# Altium PCB BCM_ECU_revA_V2.PcbDoc (part 4 of 4)
Units mm, origin at the board's own origin, x right, y up, seen from the top; angles counter-clockwise.
Board outline 170 x 110 mm, 4 copper layers (TOP SIG, GND, PWR, BOT SIG), stack 0.603 mm thick; 422 components, 413 nets, 1412 pads, 185 vias.
Unrouted connection lines stored in the file: 642.
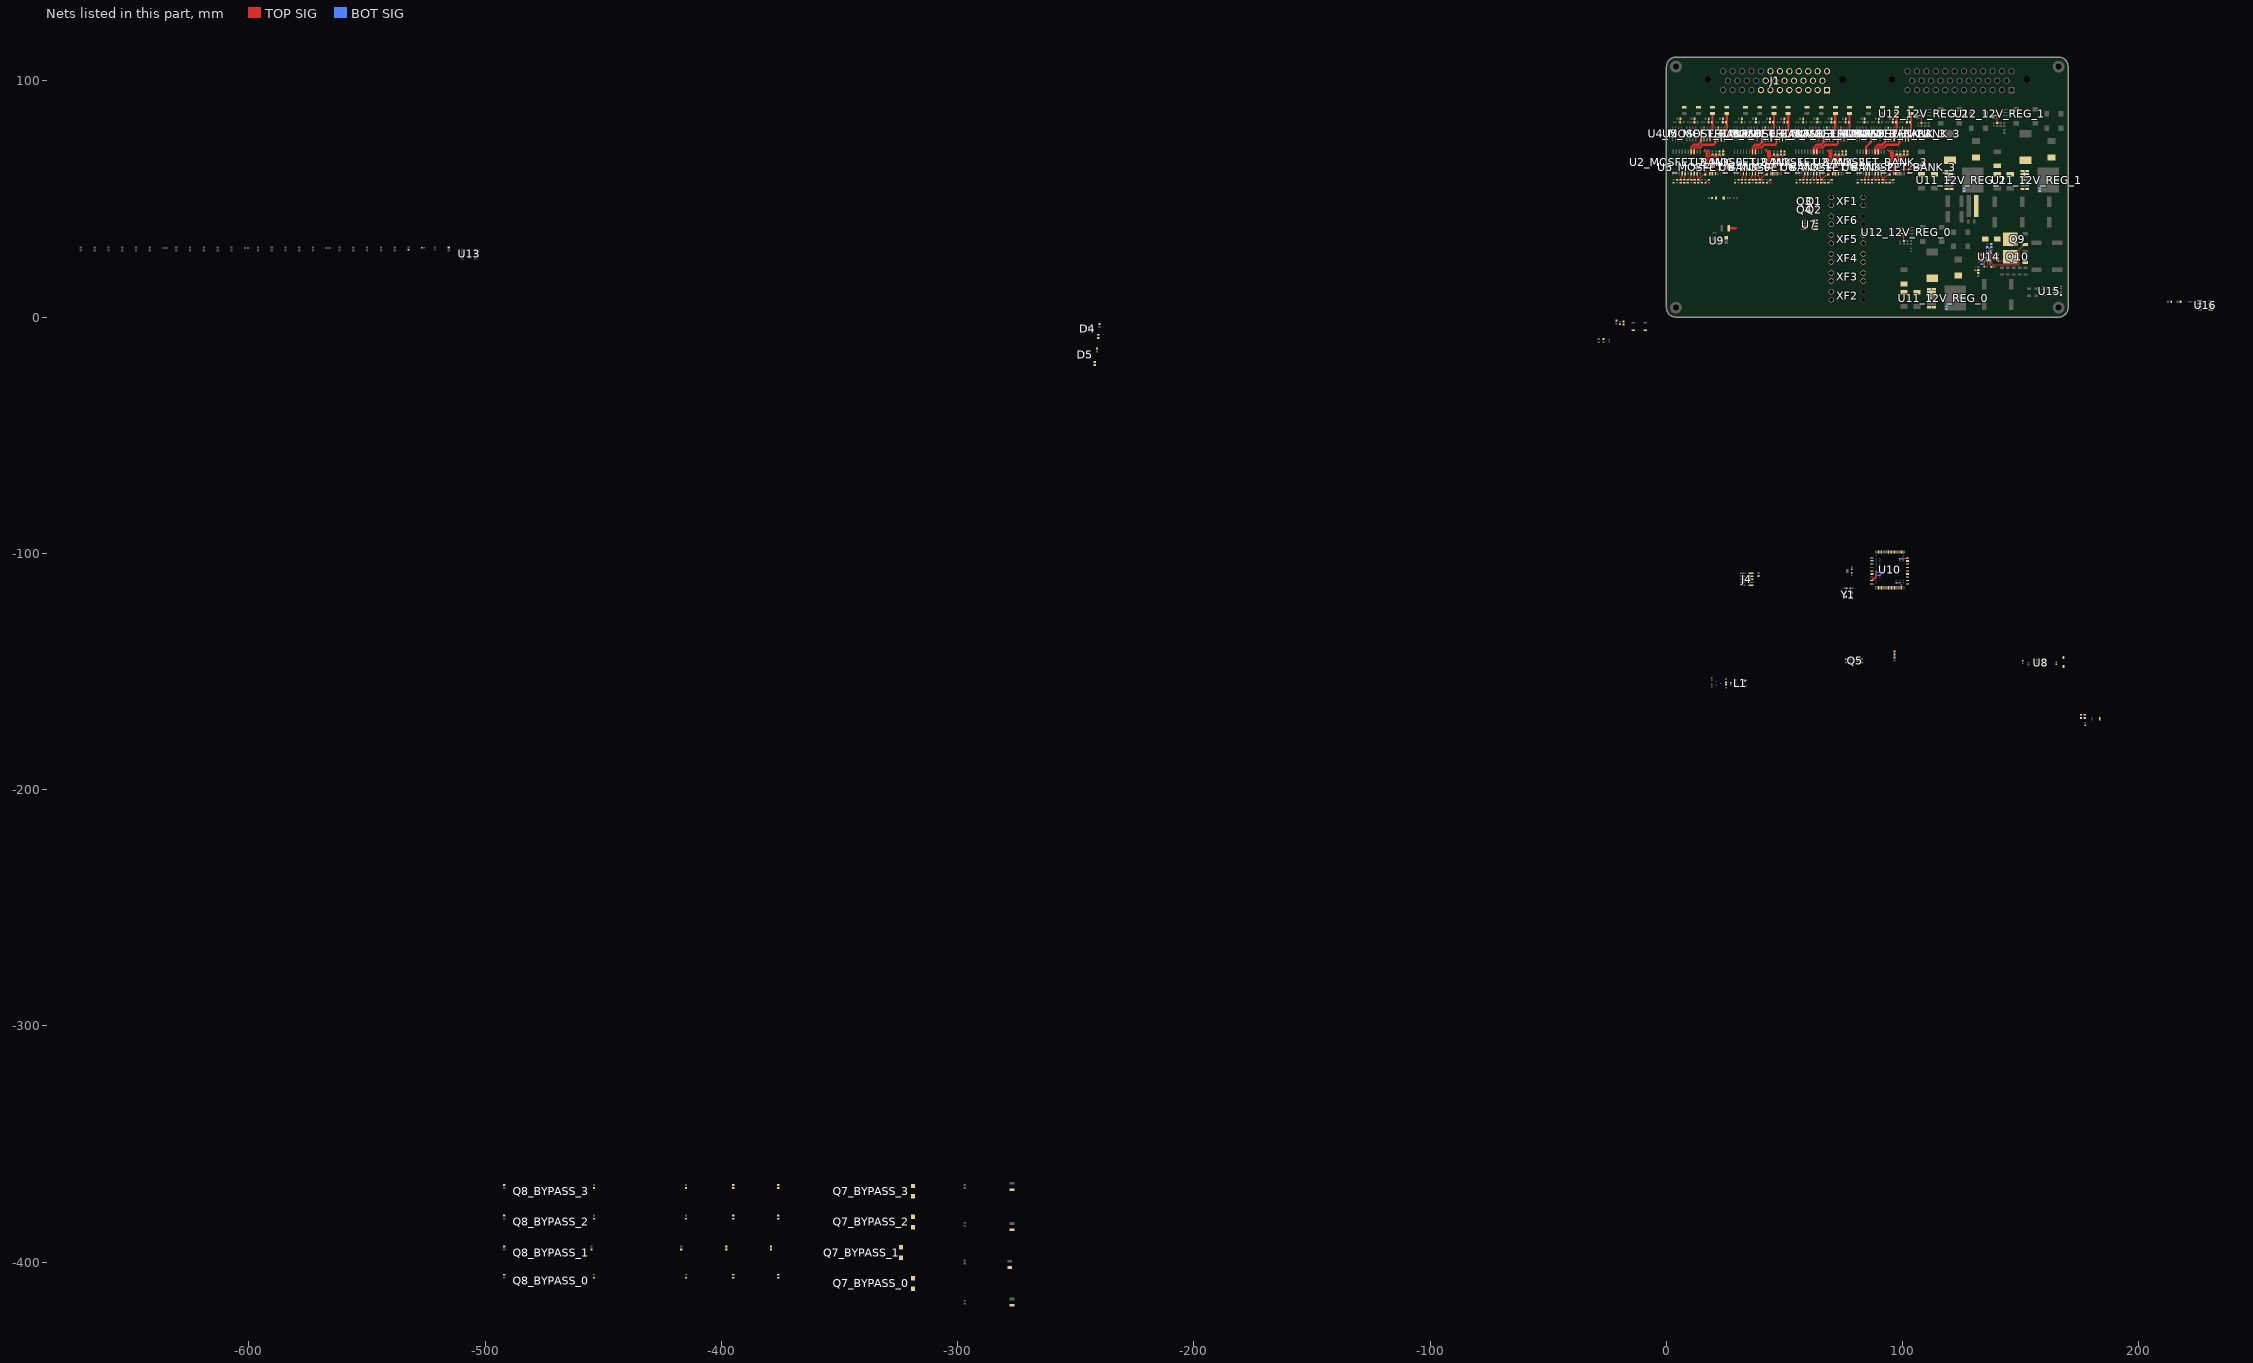
[diagram p4: the nets of this part, all layers, seen from the top]

## Via types
v1: diameter 0.5, hole 0.3, TOP SIG to BOT SIG, 181 vias
v2: diameter 0.5, hole 0.3, TOP SIG to BOT SIG, tented both sides, 4 vias

## Nets (pads, with @x,y where several pads share a name; then routed paths per layer and width w, separated by ;. In a path a pad name is that pad's centre, name@x,y a point inside that pad or via, vN(x,y) a via of type N, cw(c..) or ccw(c..) an arc to the next point about the centre after c; other vN are vias at no path point) (continued)
M2_PRE_SHUNT_MOSFET_BANK_3: U2_MOSFET_BANK_3.17 U3_MOSFET_BANK_3.1 U3_MOSFET_BANK_3.2 | length 7.9
  TOP SIG w1: 84.595,69.075 U2_MOSFET_BANK_3.17@84.595,70.05 84.595,72.095 86.595,74.095 U3_MOSFET_BANK_3.1@86.595,75.184 86.595,76.121
M2_TRIG_MOSFET_BANK_0: R2_MOSFET_BANK_0.2 U2_MOSFET_BANK_0.5 | length 3
  TOP SIG w0.3: R2_MOSFET_BANK_0.2@7.5,58.15 7.5,59 7.865,59.365 U2_MOSFET_BANK_0.5@7.865,60.95
M2_TRIG_MOSFET_BANK_1: R2_MOSFET_BANK_1.2 U2_MOSFET_BANK_1.5 | length 3
  TOP SIG w0.3: R2_MOSFET_BANK_1.2@33.5,58.15 33.5,59 33.865,59.365 U2_MOSFET_BANK_1.5@33.865,60.95
M2_TRIG_MOSFET_BANK_2: R2_MOSFET_BANK_2.2 U2_MOSFET_BANK_2.5 | length 3
  TOP SIG w0.3: R2_MOSFET_BANK_2.2@59.5,58.15 59.5,59 59.865,59.365 U2_MOSFET_BANK_2.5@59.865,60.95
M2_TRIG_MOSFET_BANK_3: R2_MOSFET_BANK_3.2 U2_MOSFET_BANK_3.5 | length 3
  TOP SIG w0.3: R2_MOSFET_BANK_3.2@85.5,58.15 85.5,59 85.865,59.365 U2_MOSFET_BANK_3.5@85.865,60.95
M3_I_SENSE_MOSFET_BANK_0: R14_MOSFET_BANK_0.2 U4_MOSFET_BANK_0.7 | length 4.6
  TOP SIG w0.3: R14_MOSFET_BANK_0.2@22.5,70.15 v1(22.5,71) ; v1@15.865,78.189 U4_MOSFET_BANK_0.7@15.865,79.816 v1@15.865,78.189 ; v1@15.865,78.189 v1@16,78.054 ; v1@15.865,78.189 v1@16,78.054 ; v1@16,78.054 v1(16,78) v1@16,78.054
  other v1: 16,78
M3_I_SENSE_MOSFET_BANK_1: R14_MOSFET_BANK_1.2 U4_MOSFET_BANK_1.7 | length 4.6
  TOP SIG w0.3: R14_MOSFET_BANK_1.2@48.5,70.15 v1(48.5,71) ; v1@41.865,78.189 U4_MOSFET_BANK_1.7@41.865,79.816 v1@41.865,78.189 ; v1@41.865,78.189 v1@42,78.054 ; v1@41.865,78.189 v1@42,78.054 ; v1@42,78.054 v1(42,78) v1@42,78.054
  other v1: 42,78
M3_I_SENSE_MOSFET_BANK_2: R14_MOSFET_BANK_2.2 U4_MOSFET_BANK_2.7 | length 4.6
  TOP SIG w0.3: R14_MOSFET_BANK_2.2@74.5,70.15 v1(74.5,71) ; v1@67.865,78.189 v1@68,78.054 ; v1@67.865,78.189 U4_MOSFET_BANK_2.7@67.865,79.816 v1@67.865,78.189 ; v1@67.865,78.189 v1@68,78.054 ; v1@68,78.054 v1(68,78) v1@68,78.054
  other v1: 68,78
M3_I_SENSE_MOSFET_BANK_3: R14_MOSFET_BANK_3.2 U4_MOSFET_BANK_3.7 | length 4.6
  TOP SIG w0.3: R14_MOSFET_BANK_3.2@100.5,70.15 v1(100.5,71) ; v1@93.865,78.189 v1@94,78.054 ; v1@93.865,78.189 U4_MOSFET_BANK_3.7@93.865,79.816 v1@93.865,78.189 ; v1@93.865,78.189 v1@94,78.054 ; v1@94,78.054 v1(94,78) v1@94,78.054
  other v1: 94,78
M3_OUT_MOSFET_BANK_0: F4_MOSFET_BANK_0.1 R20_MOSFET_BANK_0.2 U4_MOSFET_BANK_0.3 U4_MOSFET_BANK_0.4 | length 11.4
  TOP SIG w1: U4_MOSFET_BANK_0.4@18.405,75.184 18.405,77.405 19,78 19.5,78.5 F4_MOSFET_BANK_0.1@19.5,86.167
M3_OUT_MOSFET_BANK_1: F4_MOSFET_BANK_1.1 R20_MOSFET_BANK_1.2 U4_MOSFET_BANK_1.3 U4_MOSFET_BANK_1.4 | length 11.4
  TOP SIG w1: U4_MOSFET_BANK_1.4@44.405,75.184 44.405,77.405 45,78 45.5,78.5 F4_MOSFET_BANK_1.1@45.5,86.167
M3_OUT_MOSFET_BANK_2: F4_MOSFET_BANK_2.1 R20_MOSFET_BANK_2.2 U4_MOSFET_BANK_2.3 U4_MOSFET_BANK_2.4 | length 11.4
  TOP SIG w1: U4_MOSFET_BANK_2.4@70.405,75.184 70.405,77.405 71,78 71.5,78.5 F4_MOSFET_BANK_2.1@71.5,86.167
M3_OUT_MOSFET_BANK_3: F4_MOSFET_BANK_3.1 R20_MOSFET_BANK_3.2 U4_MOSFET_BANK_3.3 U4_MOSFET_BANK_3.4 | length 11.4
  TOP SIG w1: U4_MOSFET_BANK_3.4@96.405,75.184 96.405,77.405 97,78 97.5,78.5 F4_MOSFET_BANK_3.1@97.5,86.167
M3_PRE_SHUNT_MOSFET_BANK_0: U2_MOSFET_BANK_0.14 U4_MOSFET_BANK_0.1 U4_MOSFET_BANK_0.2 | length 9.8
  TOP SIG w1: 10.405,69.075 U2_MOSFET_BANK_0.14@10.405,70.05 10.405,71.705 11.7,73 13.5,73 14.595,74.095 U4_MOSFET_BANK_0.1@14.595,75.184 14.595,76.121
M3_PRE_SHUNT_MOSFET_BANK_1: U2_MOSFET_BANK_1.14 U4_MOSFET_BANK_1.1 U4_MOSFET_BANK_1.2 | length 9.8
  TOP SIG w1: 36.405,69.075 U2_MOSFET_BANK_1.14@36.405,70.05 36.405,71.705 37.7,73 39.5,73 40.595,74.095 U4_MOSFET_BANK_1.1@40.595,75.184 40.595,76.121
M3_PRE_SHUNT_MOSFET_BANK_2: U2_MOSFET_BANK_2.14 U4_MOSFET_BANK_2.1 U4_MOSFET_BANK_2.2 | length 9.8
  TOP SIG w1: 62.405,69.075 U2_MOSFET_BANK_2.14@62.405,70.05 62.405,71.705 63.7,73 65.5,73 66.595,74.095 U4_MOSFET_BANK_2.1@66.595,75.184 66.595,76.121
M3_PRE_SHUNT_MOSFET_BANK_3: U2_MOSFET_BANK_3.14 U4_MOSFET_BANK_3.1 U4_MOSFET_BANK_3.2 | length 9.8
  TOP SIG w1: 88.405,69.075 U2_MOSFET_BANK_3.14@88.405,70.05 88.405,71.705 89.7,73 91.5,73 92.595,74.095 U4_MOSFET_BANK_3.1@92.595,75.184 92.595,76.121
M3_TRIG_MOSFET_BANK_0: R3_MOSFET_BANK_0.2 U2_MOSFET_BANK_0.7 | length 3.4
  TOP SIG w0.3: R3_MOSFET_BANK_0.2@9,58.15 9.075,58.15 10.405,59.48 U2_MOSFET_BANK_0.7@10.405,60.95
M3_TRIG_MOSFET_BANK_1: R3_MOSFET_BANK_1.2 U2_MOSFET_BANK_1.7 | length 3.4
  TOP SIG w0.3: R3_MOSFET_BANK_1.2@35,58.15 35.075,58.15 36.405,59.48 U2_MOSFET_BANK_1.7@36.405,60.95
M3_TRIG_MOSFET_BANK_2: R3_MOSFET_BANK_2.2 U2_MOSFET_BANK_2.7 | length 3.4
  TOP SIG w0.3: R3_MOSFET_BANK_2.2@61,58.15 61.075,58.15 62.405,59.48 U2_MOSFET_BANK_2.7@62.405,60.95
M3_TRIG_MOSFET_BANK_3: R3_MOSFET_BANK_3.2 U2_MOSFET_BANK_3.7 | length 3.4
  TOP SIG w0.3: R3_MOSFET_BANK_3.2@87,58.15 87.075,58.15 88.405,59.48 U2_MOSFET_BANK_3.7@88.405,60.95
M4_I_SENSE_MOSFET_BANK_0: R13_MOSFET_BANK_0.2 U5_MOSFET_BANK_0.7 | length 4.6
  TOP SIG w0.3: R13_MOSFET_BANK_0.2@24,70.15 v1(24,71) ; v1@21.865,78.189 U5_MOSFET_BANK_0.7@21.865,79.816 v1@21.865,78.189 ; v1@21.865,78.189 v1@22,78.054 ; v1@21.865,78.189 v1@22,78.054 ; v1@22,78.054 v1(22,78) v1@22,78.054
  other v1: 22,78
M4_I_SENSE_MOSFET_BANK_1: R13_MOSFET_BANK_1.2 U5_MOSFET_BANK_1.7 | length 4.6
  TOP SIG w0.3: R13_MOSFET_BANK_1.2@50,70.15 v1(50,71) ; v1@47.865,78.189 U5_MOSFET_BANK_1.7@47.865,79.816 v1@47.865,78.189 ; v1@47.865,78.189 v1@48,78.054 ; v1@47.865,78.189 v1@48,78.054 ; v1@48,78.054 v1(48,78) v1@48,78.054
  other v1: 48,78
M4_I_SENSE_MOSFET_BANK_2: R13_MOSFET_BANK_2.2 U5_MOSFET_BANK_2.7 | length 4.6
  TOP SIG w0.3: R13_MOSFET_BANK_2.2@76,70.15 v1(76,71) ; v1@73.865,78.189 v1@74,78.054 ; v1@73.865,78.189 U5_MOSFET_BANK_2.7@73.865,79.816 v1@73.865,78.189 ; v1@73.865,78.189 v1@74,78.054 ; v1@74,78.054 v1(74,78) v1@74,78.054
  other v1: 74,78
M4_I_SENSE_MOSFET_BANK_3: R13_MOSFET_BANK_3.2 U5_MOSFET_BANK_3.7 | length 4.6
  TOP SIG w0.3: R13_MOSFET_BANK_3.2@102,70.15 v1(102,71) ; v1@99.865,78.189 v1@100,78.054 ; v1@99.865,78.189 U5_MOSFET_BANK_3.7@99.865,79.816 v1@99.865,78.189 ; v1@99.865,78.189 v1@100,78.054 ; v1@100,78.054 v1(100,78) v1@100,78.054
  other v1: 100,78
M4_OUT_MOSFET_BANK_0: F5_MOSFET_BANK_0.1 R21_MOSFET_BANK_0.2 U5_MOSFET_BANK_0.3 U5_MOSFET_BANK_0.4 | length 11.6
  TOP SIG w1: U5_MOSFET_BANK_0.4@24.405,75.184 24.405,77.405 25,78 25.5,78.5 R21_MOSFET_BANK_0.2@25.5,82.5 ; R21_MOSFET_BANK_0.2@25.15,82.5 25.5,82.85 F5_MOSFET_BANK_0.1@25.5,86.167
M4_OUT_MOSFET_BANK_1: F5_MOSFET_BANK_1.1 R21_MOSFET_BANK_1.2 U5_MOSFET_BANK_1.3 U5_MOSFET_BANK_1.4 | length 11.6
  TOP SIG w1: U5_MOSFET_BANK_1.4@50.405,75.184 50.405,77.405 51,78 51.5,78.5 R21_MOSFET_BANK_1.2@51.5,82.5 ; R21_MOSFET_BANK_1.2@51.15,82.5 51.5,82.85 F5_MOSFET_BANK_1.1@51.5,86.167
M4_OUT_MOSFET_BANK_2: F5_MOSFET_BANK_2.1 R21_MOSFET_BANK_2.2 U5_MOSFET_BANK_2.3 U5_MOSFET_BANK_2.4 | length 11.6
  TOP SIG w1: U5_MOSFET_BANK_2.4@76.405,75.184 76.405,77.405 77,78 77.5,78.5 R21_MOSFET_BANK_2.2@77.5,82.5 ; R21_MOSFET_BANK_2.2@77.15,82.5 77.5,82.85 F5_MOSFET_BANK_2.1@77.5,86.167
M4_OUT_MOSFET_BANK_3: F5_MOSFET_BANK_3.1 R21_MOSFET_BANK_3.2 U5_MOSFET_BANK_3.3 U5_MOSFET_BANK_3.4 | length 11.6
  TOP SIG w1: U5_MOSFET_BANK_3.4@102.405,75.184 102.405,77.405 103,78 103.5,78.5 R21_MOSFET_BANK_3.2@103.5,82.5 ; R21_MOSFET_BANK_3.2@103.15,82.5 103.5,82.85 F5_MOSFET_BANK_3.1@103.5,86.167
M4_PRE_SHUNT_MOSFET_BANK_0: U2_MOSFET_BANK_0.13 U5_MOSFET_BANK_0.1 U5_MOSFET_BANK_0.2 | length 14.6
  TOP SIG w1: 11.675,69.075 11.675,71.214 12.261,71.8 14.173,71.8 15.373,73 20.009,73 20.595,73.586 U5_MOSFET_BANK_0.1@20.595,75.184 20.595,76.121
M4_PRE_SHUNT_MOSFET_BANK_1: U2_MOSFET_BANK_1.13 U5_MOSFET_BANK_1.1 U5_MOSFET_BANK_1.2 | length 14.6
  TOP SIG w1: 37.675,69.075 37.675,71.214 38.261,71.8 40.173,71.8 41.373,73 46.009,73 46.595,73.586 U5_MOSFET_BANK_1.1@46.595,75.184 46.595,76.121
M4_PRE_SHUNT_MOSFET_BANK_2: U2_MOSFET_BANK_2.13 U5_MOSFET_BANK_2.1 U5_MOSFET_BANK_2.2 | length 14.6
  TOP SIG w1: 63.675,69.075 63.675,71.214 64.261,71.8 66.173,71.8 67.373,73 72.009,73 72.595,73.586 U5_MOSFET_BANK_2.1@72.595,75.184 72.595,76.121
M4_PRE_SHUNT_MOSFET_BANK_3: U2_MOSFET_BANK_3.13 U5_MOSFET_BANK_3.1 U5_MOSFET_BANK_3.2 | length 14.6
  TOP SIG w1: 89.675,69.075 89.675,71.214 90.261,71.8 92.173,71.8 93.373,73 98.009,73 98.595,73.586 U5_MOSFET_BANK_3.1@98.595,75.184 98.595,76.121
M4_TRIG_MOSFET_BANK_0: R4_MOSFET_BANK_0.2 U2_MOSFET_BANK_0.9 | length 3
  TOP SIG w0.3: U2_MOSFET_BANK_0.9@12.945,60.95 12.945,59.555 13.5,59 R4_MOSFET_BANK_0.2@13.5,58.15
M4_TRIG_MOSFET_BANK_1: R4_MOSFET_BANK_1.2 U2_MOSFET_BANK_1.9 | length 3
  TOP SIG w0.3: U2_MOSFET_BANK_1.9@38.945,60.95 38.945,59.555 39.5,59 R4_MOSFET_BANK_1.2@39.5,58.15
M4_TRIG_MOSFET_BANK_2: R4_MOSFET_BANK_2.2 U2_MOSFET_BANK_2.9 | length 3
  TOP SIG w0.3: U2_MOSFET_BANK_2.9@64.945,60.95 64.945,59.555 65.5,59 R4_MOSFET_BANK_2.2@65.5,58.15
M4_TRIG_MOSFET_BANK_3: R4_MOSFET_BANK_3.2 U2_MOSFET_BANK_3.9 | length 3
  TOP SIG w0.3: U2_MOSFET_BANK_3.9@90.945,60.95 90.945,59.555 91.5,59 R4_MOSFET_BANK_3.2@91.5,58.15
NetC6_MOSFET_BANK_0_1: C6_MOSFET_BANK_0.1 C7_MOSFET_BANK_0.1 R16_MOSFET_BANK_0.2 U6_MOSFET_BANK_0.13 | length 8.6
  TOP SIG w0.3: U6_MOSFET_BANK_0.13@20.825,60.7 20.825,61.825 21.5,62.5 C7_MOSFET_BANK_0.1@24.521,62.5 ; C6_MOSFET_BANK_0.1@24.521,61 C7_MOSFET_BANK_0.1@24.521,62.5 ; R16_MOSFET_BANK_0.2@25.65,64 25.65,63.925 24.729,63.004 24.729,62.686 24.543,62.5 C7_MOSFET_BANK_0.1@24.521,62.5
NetC6_MOSFET_BANK_1_1: C6_MOSFET_BANK_1.1 C7_MOSFET_BANK_1.1 R16_MOSFET_BANK_1.2 U6_MOSFET_BANK_1.13 | length 8.6
  TOP SIG w0.3: U6_MOSFET_BANK_1.13@46.825,60.7 46.825,61.825 47.5,62.5 C7_MOSFET_BANK_1.1@50.521,62.5 ; C6_MOSFET_BANK_1.1@50.521,61 C7_MOSFET_BANK_1.1@50.521,62.5 ; R16_MOSFET_BANK_1.2@51.65,64 51.65,63.925 50.729,63.004 50.729,62.686 50.543,62.5 C7_MOSFET_BANK_1.1@50.521,62.5
NetC6_MOSFET_BANK_2_1: C6_MOSFET_BANK_2.1 C7_MOSFET_BANK_2.1 R16_MOSFET_BANK_2.2 U6_MOSFET_BANK_2.13 | length 8.6
  TOP SIG w0.3: U6_MOSFET_BANK_2.13@72.825,60.7 72.825,61.825 73.5,62.5 C7_MOSFET_BANK_2.1@76.521,62.5 ; C6_MOSFET_BANK_2.1@76.521,61 C7_MOSFET_BANK_2.1@76.521,62.5 ; R16_MOSFET_BANK_2.2@77.65,64 77.65,63.925 76.729,63.004 76.729,62.686 76.543,62.5 C7_MOSFET_BANK_2.1@76.521,62.5
NetC6_MOSFET_BANK_3_1: C6_MOSFET_BANK_3.1 C7_MOSFET_BANK_3.1 R16_MOSFET_BANK_3.2 U6_MOSFET_BANK_3.13 | length 8.6
  TOP SIG w0.3: U6_MOSFET_BANK_3.13@98.825,60.7 98.825,61.825 99.5,62.5 C7_MOSFET_BANK_3.1@102.521,62.5 ; C6_MOSFET_BANK_3.1@102.521,61 C7_MOSFET_BANK_3.1@102.521,62.5 ; R16_MOSFET_BANK_3.2@103.65,64 103.65,63.925 102.729,63.004 102.729,62.686 102.543,62.5 C7_MOSFET_BANK_3.1@102.521,62.5
NetC11_1: C11.1 D2.1 R33.2 U8.10
NetC13_1: C13.1 R33.1 R34.2 SW1.2
NetC32_1: C32.1 C33.1 U10.48 | length 3.6
  TOP SIG w0.3: v1(98.75,-112.75) 99.5,-113.5 U10.48@99.5,-114.575
  BOT SIG w0.3: C32.1@97.25,-112.479 C33.1@98.75,-112.479
NetC34_1: C34.1 C35.1 U10.73 | length 3.3
  TOP SIG w0.3: v1(100.25,-102) U10.73@102.075,-102
  BOT SIG w0.3: C34.1@98.75,-102.271 C35.1@100.25,-102.271
NetC47_12V_REG_0_1: C47_12V_REG_0.1 U11_12V_REG_0.3
  other v1: 112.15,9.27
NetC47_12V_REG_0_2: C47_12V_REG_0.2 D6_12V_REG_0.1 L2_12V_REG_0.1 U11_12V_REG_0.1
  other v1: 112.15,11.81
NetC47_12V_REG_1_1: C47_12V_REG_1.1 U11_12V_REG_1.3
  other v1: 151.65,59.27
NetC47_12V_REG_1_2: C47_12V_REG_1.2 D6_12V_REG_1.1 L2_12V_REG_1.1 U11_12V_REG_1.1
  other v1: 151.65,61.81
NetC47_12V_REG_2_1: C47_12V_REG_2.1 U11_12V_REG_2.3
  other v1: 119.65,59.27
NetC47_12V_REG_2_2: C47_12V_REG_2.2 D6_12V_REG_2.1 L2_12V_REG_2.1 U11_12V_REG_2.1
  other v1: 119.65,61.81
NetC50_1: C50.1 C51.1 R60.2 U13.13
NetC66_1: C66.1 L3.2 Q9.4 Q10.4 U14.6 | length 8.3
  TOP SIG w0.2: U14.6@138.275,24.5 139.073,24.5 139.544,24.029 140.264,24.029 140.5,23.793 C66.1@140.5,23.771 143.771,23.771 Q10.4@145.5,25.5
NetC66_2: C66.2 U14.7 | length 2.3
  TOP SIG w0.2: U14.7@138.275,25 139.25,25 139.521,24.729 C66.2@140.5,24.729
NetC72_1: C72.1 U14.9 U14.12 | length 4.5
  TOP SIG w0.2: U14.12@137,27.275 v1(137,28.5) ; U14.9@138.275,26 138.999,26 v1(139.749,26.75)
  BOT SIG w0.2: v1(137,28.5) 137,28.419 137.221,28.198 137.221,27.486 137.457,27.25 C72.1@137.479,27.25
NetC73_1: C73.1 U14.17 | length 3.1
  TOP SIG w0.2: C73.1@132.25,24.479 132.25,24.5 132.486,24.736 132.508,24.736 133.771,26 U14.17@134.725,26
NetC74_1: C74.1 R88.1 U14.20 | length 4.4
  TOP SIG w0.2: C74.1@134.521,21.25 134.725,21.454 U14.20@134.725,24.5
  BOT SIG w0.2: R88.1@133.5,22.35 133.65,22.5 v1(134.5,22.5)
NetC75_1: C75.1 R88.2 | length 3.1
  BOT SIG w0.2: R88.2@133.5,23.65 133.6,23.75 C75.1@136.521,23.75
NetC76_1: C76.1 R90.1 U14.16 | length 2.5
  TOP SIG w0.2: C76.1@132.25,26.979 v1@133.271,26.979 ; v1(133.5,27) 134,26.5 U14.16@134.725,26.5
NetD4_1: D4.1 R43.2
NetD4_4: D4.4 R44.2
NetD5_1: D5.1 R45.2
NetD5_4: D5.4 R46.2
NetD7_BYPASS_0_1: D7_BYPASS_0.1 Q7_BYPASS_0.1 Q7_BYPASS_0.2 Q7_BYPASS_0.3 Q8_BYPASS_0.4 R54_BYPASS_0.1
NetD7_BYPASS_0_2: D7_BYPASS_0.2 F6_BYPASS_0.2
NetD7_BYPASS_1_1: D7_BYPASS_1.1 Q7_BYPASS_1.1 Q7_BYPASS_1.2 Q7_BYPASS_1.3 Q8_BYPASS_1.4 R54_BYPASS_1.1
NetD7_BYPASS_1_2: D7_BYPASS_1.2 F6_BYPASS_1.2
NetD7_BYPASS_2_1: D7_BYPASS_2.1 Q7_BYPASS_2.1 Q7_BYPASS_2.2 Q7_BYPASS_2.3 Q8_BYPASS_2.4 R54_BYPASS_2.1
NetD7_BYPASS_2_2: D7_BYPASS_2.2 F6_BYPASS_2.2
NetD7_BYPASS_3_1: D7_BYPASS_3.1 Q7_BYPASS_3.1 Q7_BYPASS_3.2 Q7_BYPASS_3.3 Q8_BYPASS_3.4 R54_BYPASS_3.1
NetD7_BYPASS_3_2: D7_BYPASS_3.2 F6_BYPASS_3.2
NetD8_1: D8.1 R93.2 R94.1 | length 2.7
  TOP SIG w0.2: D8.1@130.5,19.84 131.99,19.84 R94.1@132,19.85 R93.2@132,18.65
NetL3_1: L3.1 R85.2 U14.2 | length 1.2
  TOP SIG w0.2: v1(136,22.5) U14.2@136,23.725
NetQ1_5-6-7-8: Q1.5-6-7-8 Q3.5-6-7-8 XF1.3 XF1.4
NetQ5_1: Q5.1 R30.2 R32.2
NetQ8_BYPASS_0_2: Q8_BYPASS_0.2 R58_BYPASS_0.1 R59_BYPASS_0.2
NetQ8_BYPASS_0_3: Q8_BYPASS_0.3 R56_BYPASS_0.1
NetQ8_BYPASS_0_5: Q8_BYPASS_0.5 R54_BYPASS_0.2 R55_BYPASS_0.1
NetQ8_BYPASS_1_2: Q8_BYPASS_1.2 R58_BYPASS_1.1 R59_BYPASS_1.2
NetQ8_BYPASS_1_3: Q8_BYPASS_1.3 R56_BYPASS_1.1
NetQ8_BYPASS_1_5: Q8_BYPASS_1.5 R54_BYPASS_1.2 R55_BYPASS_1.1
NetQ8_BYPASS_2_2: Q8_BYPASS_2.2 R58_BYPASS_2.1 R59_BYPASS_2.2
NetQ8_BYPASS_2_3: Q8_BYPASS_2.3 R56_BYPASS_2.1
NetQ8_BYPASS_2_5: Q8_BYPASS_2.5 R54_BYPASS_2.2 R55_BYPASS_2.1
NetQ8_BYPASS_3_2: Q8_BYPASS_3.2 R58_BYPASS_3.1 R59_BYPASS_3.2
NetQ8_BYPASS_3_3: Q8_BYPASS_3.3 R56_BYPASS_3.1
NetQ8_BYPASS_3_5: Q8_BYPASS_3.5 R54_BYPASS_3.2 R55_BYPASS_3.1
NetQ9_1: Q9.1 U14.5 | length 22.5
  TOP SIG w0.2: U14.5@137.5,23.725 137.5,23 138.25,22.25 149,22.25 149.25,22.5 149.25,28.473 151.491,30.714 Q9.1@151.935,30.714
NetQ10_1: Q10.1 U14.11 | length 1.3
  TOP SIG w0.2: U14.11@137.5,27.275 137.5,28.169 137.75,28.419 v1(137.75,28.5)
NetR1_MOSFET_BANK_0_1: R1_MOSFET_BANK_0.1
NetR1_MOSFET_BANK_1_1: R1_MOSFET_BANK_1.1
NetR1_MOSFET_BANK_2_1: R1_MOSFET_BANK_2.1
NetR1_MOSFET_BANK_3_1: R1_MOSFET_BANK_3.1
NetR2_MOSFET_BANK_0_1: R2_MOSFET_BANK_0.1
NetR2_MOSFET_BANK_1_1: R2_MOSFET_BANK_1.1
NetR2_MOSFET_BANK_2_1: R2_MOSFET_BANK_2.1
NetR2_MOSFET_BANK_3_1: R2_MOSFET_BANK_3.1
NetR3_MOSFET_BANK_0_1: R3_MOSFET_BANK_0.1
NetR3_MOSFET_BANK_1_1: R3_MOSFET_BANK_1.1
NetR3_MOSFET_BANK_2_1: R3_MOSFET_BANK_2.1
NetR3_MOSFET_BANK_3_1: R3_MOSFET_BANK_3.1
NetR4_MOSFET_BANK_0_1: R4_MOSFET_BANK_0.1
NetR4_MOSFET_BANK_1_1: R4_MOSFET_BANK_1.1
NetR4_MOSFET_BANK_2_1: R4_MOSFET_BANK_2.1
NetR4_MOSFET_BANK_3_1: R4_MOSFET_BANK_3.1
NetR5_MOSFET_BANK_0_1: R5_MOSFET_BANK_0.1
NetR5_MOSFET_BANK_1_1: R5_MOSFET_BANK_1.1
NetR5_MOSFET_BANK_2_1: R5_MOSFET_BANK_2.1
NetR5_MOSFET_BANK_3_1: R5_MOSFET_BANK_3.1
NetR6_MOSFET_BANK_0_1: R6_MOSFET_BANK_0.1
NetR6_MOSFET_BANK_1_1: R6_MOSFET_BANK_1.1
NetR6_MOSFET_BANK_2_1: R6_MOSFET_BANK_2.1
NetR6_MOSFET_BANK_3_1: R6_MOSFET_BANK_3.1
NetR9_MOSFET_BANK_0_1: R9_MOSFET_BANK_0.1 R10_MOSFET_BANK_0.1 | length 2
  TOP SIG w0.3: R10_MOSFET_BANK_0.1@16.5,56.85 16.575,56.85 17.625,57.9 17.75,57.9 R9_MOSFET_BANK_0.1@18,58.15
NetR9_MOSFET_BANK_1_1: R9_MOSFET_BANK_1.1 R10_MOSFET_BANK_1.1 | length 2
  TOP SIG w0.3: R10_MOSFET_BANK_1.1@42.5,56.85 42.575,56.85 43.625,57.9 43.75,57.9 R9_MOSFET_BANK_1.1@44,58.15
NetR9_MOSFET_BANK_2_1: R9_MOSFET_BANK_2.1 R10_MOSFET_BANK_2.1 | length 2
  TOP SIG w0.3: R10_MOSFET_BANK_2.1@68.5,56.85 68.575,56.85 69.625,57.9 69.75,57.9 R9_MOSFET_BANK_2.1@70,58.15
NetR9_MOSFET_BANK_3_1: R9_MOSFET_BANK_3.1 R10_MOSFET_BANK_3.1 | length 2
  TOP SIG w0.3: R10_MOSFET_BANK_3.1@94.5,56.85 94.575,56.85 95.625,57.9 95.75,57.9 R9_MOSFET_BANK_3.1@96,58.15
NetR13_MOSFET_BANK_0_1: R13_MOSFET_BANK_0.1 U6_MOSFET_BANK_0.4 | length 4.8
  TOP SIG w0.3: U6_MOSFET_BANK_0.4@20.825,66.3 20.825,67.324 21.001,67.5 22.575,67.5 23.925,68.85 R13_MOSFET_BANK_0.1@24,68.85
NetR13_MOSFET_BANK_1_1: R13_MOSFET_BANK_1.1 U6_MOSFET_BANK_1.4 | length 4.8
  TOP SIG w0.3: U6_MOSFET_BANK_1.4@46.825,66.3 46.825,67.324 47.001,67.5 48.575,67.5 49.925,68.85 R13_MOSFET_BANK_1.1@50,68.85
NetR13_MOSFET_BANK_2_1: R13_MOSFET_BANK_2.1 U6_MOSFET_BANK_2.4 | length 4.8
  TOP SIG w0.3: U6_MOSFET_BANK_2.4@72.825,66.3 72.825,67.324 73.001,67.5 74.575,67.5 75.925,68.85 R13_MOSFET_BANK_2.1@76,68.85
NetR13_MOSFET_BANK_3_1: R13_MOSFET_BANK_3.1 U6_MOSFET_BANK_3.4 | length 4.8
  TOP SIG w0.3: U6_MOSFET_BANK_3.4@98.825,66.3 98.825,67.324 99.001,67.5 100.575,67.5 101.925,68.85 R13_MOSFET_BANK_3.1@102,68.85
NetR14_MOSFET_BANK_0_1: R14_MOSFET_BANK_0.1 U6_MOSFET_BANK_0.5 | length 4
  TOP SIG w0.3: U6_MOSFET_BANK_0.5@20.175,66.3 20.175,67.375 20.8,68 21.575,68 22.425,68.85 R14_MOSFET_BANK_0.1@22.5,68.85
NetR14_MOSFET_BANK_1_1: R14_MOSFET_BANK_1.1 U6_MOSFET_BANK_1.5 | length 4
  TOP SIG w0.3: U6_MOSFET_BANK_1.5@46.175,66.3 46.175,67.375 46.8,68 47.575,68 48.425,68.85 R14_MOSFET_BANK_1.1@48.5,68.85
NetR14_MOSFET_BANK_2_1: R14_MOSFET_BANK_2.1 U6_MOSFET_BANK_2.5 | length 4
  TOP SIG w0.3: U6_MOSFET_BANK_2.5@72.175,66.3 72.175,67.375 72.8,68 73.575,68 74.425,68.85 R14_MOSFET_BANK_2.1@74.5,68.85
NetR14_MOSFET_BANK_3_1: R14_MOSFET_BANK_3.1 U6_MOSFET_BANK_3.5 | length 4
  TOP SIG w0.3: U6_MOSFET_BANK_3.5@98.175,66.3 98.175,67.375 98.8,68 99.575,68 100.425,68.85 R14_MOSFET_BANK_3.1@100.5,68.85
NetR15_MOSFET_BANK_0_1: R15_MOSFET_BANK_0.1 U6_MOSFET_BANK_0.6 | length 3.2
  TOP SIG w0.3: U6_MOSFET_BANK_0.6@19.525,66.3 19.525,67.45 20.925,68.85 R15_MOSFET_BANK_0.1@21,68.85
NetR15_MOSFET_BANK_1_1: R15_MOSFET_BANK_1.1 U6_MOSFET_BANK_1.6 | length 3.2
  TOP SIG w0.3: U6_MOSFET_BANK_1.6@45.525,66.3 45.525,67.45 46.925,68.85 R15_MOSFET_BANK_1.1@47,68.85
NetR15_MOSFET_BANK_2_1: R15_MOSFET_BANK_2.1 U6_MOSFET_BANK_2.6 | length 3.2
  TOP SIG w0.3: U6_MOSFET_BANK_2.6@71.525,66.3 71.525,67.45 72.925,68.85 R15_MOSFET_BANK_2.1@73,68.85
NetR15_MOSFET_BANK_3_1: R15_MOSFET_BANK_3.1 U6_MOSFET_BANK_3.6 | length 3.2
  TOP SIG w0.3: U6_MOSFET_BANK_3.6@97.525,66.3 97.525,67.45 98.925,68.85 R15_MOSFET_BANK_3.1@99,68.85
NetR17_MOSFET_BANK_0_1: R17_MOSFET_BANK_0.1 U6_MOSFET_BANK_0.7 | length 2.9
  TOP SIG w0.3: U6_MOSFET_BANK_0.7@18.875,66.3 18.875,68.3 19.425,68.85 R17_MOSFET_BANK_0.1@19.5,68.85
NetR17_MOSFET_BANK_1_1: R17_MOSFET_BANK_1.1 U6_MOSFET_BANK_1.7 | length 2.9
  TOP SIG w0.3: U6_MOSFET_BANK_1.7@44.875,66.3 44.875,68.3 45.425,68.85 R17_MOSFET_BANK_1.1@45.5,68.85
NetR17_MOSFET_BANK_2_1: R17_MOSFET_BANK_2.1 U6_MOSFET_BANK_2.7 | length 2.9
  TOP SIG w0.3: U6_MOSFET_BANK_2.7@70.875,66.3 70.875,68.3 71.425,68.85 R17_MOSFET_BANK_2.1@71.5,68.85
NetR17_MOSFET_BANK_3_1: R17_MOSFET_BANK_3.1 U6_MOSFET_BANK_3.7 | length 2.9
  TOP SIG w0.3: U6_MOSFET_BANK_3.7@96.875,66.3 96.875,68.3 97.425,68.85 R17_MOSFET_BANK_3.1@97.5,68.85
NetR34_1: R34.1 U8.9
NetR36_1: R36.1 U16.7
NetR39_2: R39.2 SW2.1
NetR40_2: R40.2 SW3.1
NetR48_12V_REG_0_1: R48_12V_REG_0.1 U11_12V_REG_0.5
  other v1: 112.15,6.73
NetR48_12V_REG_1_1: R48_12V_REG_1.1 U11_12V_REG_1.5
  other v1: 151.65,56.73
NetR48_12V_REG_2_1: R48_12V_REG_2.1 U11_12V_REG_2.5
  other v1: 119.65,56.73
NetR51_12V_REG_0_2: R51_12V_REG_0.2
NetR51_12V_REG_1_2: R51_12V_REG_1.2
NetR51_12V_REG_2_2: R51_12V_REG_2.2
NetR52_12V_REG_0_2: R52_12V_REG_0.2 U12_12V_REG_0.7 | length 4.2
  TOP SIG w0.3: U12_12V_REG_0.7@99.184,35.365 99.85,35.365 100.5,34.715 R52_12V_REG_0.2@100.5,32.15
NetR52_12V_REG_1_2: R52_12V_REG_1.2 U12_12V_REG_1.7 | length 4.2
  TOP SIG w0.3: U12_12V_REG_1.7@138.684,85.365 139.35,85.365 140,84.715 R52_12V_REG_1.2@140,82.15
NetR52_12V_REG_2_2: R52_12V_REG_2.2 U12_12V_REG_2.7 | length 4.2
  TOP SIG w0.3: U12_12V_REG_2.7@106.684,85.365 107.35,85.365 108,84.715 R52_12V_REG_2.2@108,82.15
NetR53_1: R53.1 U16.3
NetR86_1: R86.1 U14.13 | length 3.2
  TOP SIG w0.2: v1(136.25,28.5) 136.25,28.419 136.5,28.169 U14.13@136.5,27.275
  BOT SIG w0.2: v1(136.25,28.5) 136.307,28.557 136.307,28.807 136.8,29.3 137.2,29.3 R86.1@137.5,29.6
NetR86_2: R86.2
NetR87_2: R87.2 U15.6 | length 3.1
  TOP SIG w0.2: U15.6@164.316,10.365 165.91,10.365 166.925,9.35 R87.2@167,9.35
NetR89_1: R89.1 U14.4 | length 2.7
  TOP SIG w0.2: U14.4@137,23.725 137,21.925 137.6,21.325 R89.1@137.6,21.25
  other v1: 137,22.5
NetR90_2: R90.2 R92.1 U14.18 | length 3.3
  TOP SIG w0.2: v1(133.5,24.75) 133.5,25.25 133.75,25.5 U14.18@134.725,25.5
  BOT SIG w0.2: R90.2@133.5,25.1 R92.1@135,25.1
NetR91_1: R91.1 U14.15 | length 2.4
  TOP SIG w0.2: U14.15@135.5,27.275 v1(135.5,28.5)
  BOT SIG w0.2: v1(135.5,28.5) 135.5,29.35 R91.1@135.75,29.6
NetU10_1: U10.1
NetU10_2: U10.2
NetU10_3: U10.3
NetU10_4: U10.4
NetU10_5: U10.5
NetU10_7: U10.7
NetU10_17: U10.17
NetU10_18: U10.18
NetU10_22: U10.22
NetU10_23: U10.23
NetU10_24: U10.24
NetU10_25: U10.25
NetU10_28: U10.28
NetU10_29: U10.29
NetU10_30: U10.30
NetU10_31: U10.31
NetU10_32: U10.32
NetU10_33: U10.33
NetU10_34: U10.34
NetU10_35: U10.35
NetU10_36: U10.36
NetU10_37: U10.37
NetU10_38: U10.38
NetU10_39: U10.39
NetU10_40: U10.40
NetU10_41: U10.41
NetU10_42: U10.42
NetU10_43: U10.43
NetU10_44: U10.44
NetU10_45: U10.45
NetU10_46: U10.46
NetU10_47: U10.47
NetU10_51: U10.51
NetU10_52: U10.52
NetU10_53: U10.53
NetU10_54: U10.54
NetU10_55: U10.55
NetU10_56: U10.56
NetU10_57: U10.57
NetU10_58: U10.58
NetU10_59: U10.59
NetU10_60: U10.60
NetU10_61: U10.61
NetU10_62: U10.62
NetU10_63: U10.63
NetU10_64: U10.64
NetU10_65: U10.65
NetU10_66: U10.66
NetU10_67: U10.67
NetU10_68: U10.68
NetU10_69: U10.69
NetU10_70: U10.70
NetU10_71: U10.71
NetU10_77: U10.77
NetU10_78: U10.78
NetU10_79: U10.79
NetU10_80: U10.80
NetU10_81: U10.81
NetU10_82: U10.82
NetU10_83: U10.83
NetU10_84: U10.84
NetU10_85: U10.85
NetU10_86: U10.86
NetU10_87: U10.87
NetU10_88: U10.88
NetU10_90: U10.90
NetU10_91: U10.91
NetU10_92: U10.92
NetU10_93: U10.93
NetU10_95: U10.95
NetU10_96: U10.96
NetU10_97: U10.97
NetU10_98: U10.98
NetU15_7: U15.7
NetU16_1: U16.1
NetU16_2: U16.2
NetU16_5: U16.5
NetU16_6: U16.6
nINH_BYPASS_0: Q8_BYPASS_0.6 R55_BYPASS_0.2
nINH_BYPASS_1: Q8_BYPASS_1.6 R55_BYPASS_1.2
nINH_BYPASS_2: Q8_BYPASS_2.6 R55_BYPASS_2.2
nINH_BYPASS_3: Q8_BYPASS_3.6 R55_BYPASS_3.2
nPWR_FLT_LED: R46.1
OUT_0: F2_MOSFET_BANK_0.2 J1.1 Q7_BYPASS_0.5-6-7-8
OUT_1: F3_MOSFET_BANK_0.2 J1.2 Q7_BYPASS_1.5-6-7-8
OUT_2: F4_MOSFET_BANK_0.2 J1.3 Q7_BYPASS_2.5-6-7-8
OUT_3: F5_MOSFET_BANK_0.2 J1.4 Q7_BYPASS_3.5-6-7-8
OUT_4: F2_MOSFET_BANK_1.2 J1.5
OUT_5: F3_MOSFET_BANK_1.2 J1.6
OUT_6: F4_MOSFET_BANK_1.2 J1.13
OUT_7: F5_MOSFET_BANK_1.2 J1.14
OUT_8: F2_MOSFET_BANK_2.2 J1.15
OUT_9: F3_MOSFET_BANK_2.2 J1.16
OUT_10: F4_MOSFET_BANK_2.2 J1.17
OUT_11: F5_MOSFET_BANK_2.2 J1.24
OUT_12: F2_MOSFET_BANK_3.2 J1.25
OUT_13: F3_MOSFET_BANK_3.2 J1.26
OUT_14: F4_MOSFET_BANK_3.2 J1.27
OUT_15: F5_MOSFET_BANK_3.2 J1.28
PD_1_MOSFET_BANK_0: R18_MOSFET_BANK_0.1 R22_MOSFET_BANK_0.1 U6_MOSFET_BANK_0.8 | length 6.3
  TOP SIG w0.3: R18_MOSFET_BANK_0.1@5.85,82.5 5.875,82.525 5.875,83.975 R22_MOSFET_BANK_0.1@5.9,84 ; v1(18,71) 18,70.3 18.225,70.075 U6_MOSFET_BANK_0.8@18.225,66.3
  other v1: 5.25,82.5
PD_1_MOSFET_BANK_1: R18_MOSFET_BANK_1.1 R22_MOSFET_BANK_1.1 U6_MOSFET_BANK_1.8 | length 6.3
  TOP SIG w0.3: R18_MOSFET_BANK_1.1@31.85,82.5 31.875,82.525 31.875,83.975 R22_MOSFET_BANK_1.1@31.9,84 ; v1(44,71) 44,70.3 44.225,70.075 U6_MOSFET_BANK_1.8@44.225,66.3
  other v1: 31.25,82.5
PD_1_MOSFET_BANK_2: R18_MOSFET_BANK_2.1 R22_MOSFET_BANK_2.1 U6_MOSFET_BANK_2.8 | length 6.3
  TOP SIG w0.3: R18_MOSFET_BANK_2.1@57.85,82.5 57.875,82.525 57.875,83.975 R22_MOSFET_BANK_2.1@57.9,84 ; v1(70,71) 70,70.3 70.225,70.075 U6_MOSFET_BANK_2.8@70.225,66.3
  other v1: 57.25,82.5
PD_1_MOSFET_BANK_3: R18_MOSFET_BANK_3.1 R22_MOSFET_BANK_3.1 U6_MOSFET_BANK_3.8 | length 6.3
  TOP SIG w0.3: R18_MOSFET_BANK_3.1@83.85,82.5 83.875,82.525 83.875,83.975 R22_MOSFET_BANK_3.1@83.9,84 ; v1(96,71) 96,70.3 96.225,70.075 U6_MOSFET_BANK_3.8@96.225,66.3
  other v1: 83.25,82.5
PD_2_MOSFET_BANK_0: R19_MOSFET_BANK_0.1 R23_MOSFET_BANK_0.1 U6_MOSFET_BANK_0.9 | length 12.8
  TOP SIG w0.3: R19_MOSFET_BANK_0.1@11.85,82.5 11.875,82.525 11.875,83.975 R23_MOSFET_BANK_0.1@11.9,84 ; v1(15.75,71) 15.77,70.98 15.77,70.63 16.9,69.5 16.9,65.214 18.225,63.889 U6_MOSFET_BANK_0.9@18.225,60.7
  other v1: 11.25,82.5
PD_2_MOSFET_BANK_1: R19_MOSFET_BANK_1.1 R23_MOSFET_BANK_1.1 U6_MOSFET_BANK_1.9 | length 12.8
  TOP SIG w0.3: R19_MOSFET_BANK_1.1@37.85,82.5 37.875,82.525 37.875,83.975 R23_MOSFET_BANK_1.1@37.9,84 ; v1(41.75,71) 41.77,70.98 41.77,70.63 42.9,69.5 42.9,65.214 44.225,63.889 U6_MOSFET_BANK_1.9@44.225,60.7
  other v1: 37.25,82.5
PD_2_MOSFET_BANK_2: R19_MOSFET_BANK_2.1 R23_MOSFET_BANK_2.1 U6_MOSFET_BANK_2.9 | length 12.8
  TOP SIG w0.3: R19_MOSFET_BANK_2.1@63.85,82.5 63.875,82.525 63.875,83.975 R23_MOSFET_BANK_2.1@63.9,84 ; v1(67.75,71) 67.77,70.98 67.77,70.63 68.9,69.5 68.9,65.214 70.225,63.889 U6_MOSFET_BANK_2.9@70.225,60.7
  other v1: 63.25,82.5
PD_2_MOSFET_BANK_3: R19_MOSFET_BANK_3.1 R23_MOSFET_BANK_3.1 U6_MOSFET_BANK_3.9 | length 12.8
  TOP SIG w0.3: R19_MOSFET_BANK_3.1@89.85,82.5 89.875,82.525 89.875,83.975 R23_MOSFET_BANK_3.1@89.9,84 ; v1(93.75,71) 93.77,70.98 93.77,70.63 94.9,69.5 94.9,65.214 96.225,63.889 U6_MOSFET_BANK_3.9@96.225,60.7
  other v1: 89.25,82.5
PD_3_MOSFET_BANK_0: R20_MOSFET_BANK_0.1 R24_MOSFET_BANK_0.1 U6_MOSFET_BANK_0.10 | length 12.8
  TOP SIG w0.3: v1(16.5,71) 16.5,70.532 17.302,69.73 17.302,65.38 18.875,63.807 U6_MOSFET_BANK_0.10@18.875,60.7 ; R20_MOSFET_BANK_0.1@17.85,82.5 17.875,82.525 17.875,83.975 R24_MOSFET_BANK_0.1@17.9,84
  other v1: 17.25,82.5
PD_3_MOSFET_BANK_1: R20_MOSFET_BANK_1.1 R24_MOSFET_BANK_1.1 U6_MOSFET_BANK_1.10 | length 12.8
  TOP SIG w0.3: v1(42.5,71) 42.5,70.532 43.302,69.73 43.302,65.38 44.875,63.807 U6_MOSFET_BANK_1.10@44.875,60.7 ; R20_MOSFET_BANK_1.1@43.85,82.5 43.875,82.525 43.875,83.975 R24_MOSFET_BANK_1.1@43.9,84
  other v1: 43.25,82.5
PD_3_MOSFET_BANK_2: R20_MOSFET_BANK_2.1 R24_MOSFET_BANK_2.1 U6_MOSFET_BANK_2.10 | length 12.8
  TOP SIG w0.3: v1(68.5,71) 68.5,70.532 69.302,69.73 69.302,65.38 70.875,63.807 U6_MOSFET_BANK_2.10@70.875,60.7 ; R20_MOSFET_BANK_2.1@69.85,82.5 69.875,82.525 69.875,83.975 R24_MOSFET_BANK_2.1@69.9,84
  other v1: 69.25,82.5
PD_3_MOSFET_BANK_3: R20_MOSFET_BANK_3.1 R24_MOSFET_BANK_3.1 U6_MOSFET_BANK_3.10 | length 12.8
  TOP SIG w0.3: v1(94.5,71) 94.5,70.532 95.302,69.73 95.302,65.38 96.875,63.807 U6_MOSFET_BANK_3.10@96.875,60.7 ; R20_MOSFET_BANK_3.1@95.85,82.5 95.875,82.525 95.875,83.975 R24_MOSFET_BANK_3.1@95.9,84
  other v1: 95.25,82.5
PD_4_MOSFET_BANK_0: R21_MOSFET_BANK_0.1 R25_MOSFET_BANK_0.1 U6_MOSFET_BANK_0.11 | length 12.8
  TOP SIG w0.3: v1(17.25,71) 17.25,70.35 17.703,69.897 17.703,65.547 19.525,63.725 U6_MOSFET_BANK_0.11@19.525,60.7 ; R21_MOSFET_BANK_0.1@23.85,82.5 23.875,82.525 23.875,83.975 R25_MOSFET_BANK_0.1@23.9,84
  other v1: 23.25,82.5
PD_4_MOSFET_BANK_1: R21_MOSFET_BANK_1.1 R25_MOSFET_BANK_1.1 U6_MOSFET_BANK_1.11 | length 12.8
  TOP SIG w0.3: v1(43.25,71) 43.25,70.35 43.703,69.897 43.703,65.547 45.525,63.725 U6_MOSFET_BANK_1.11@45.525,60.7 ; R21_MOSFET_BANK_1.1@49.85,82.5 49.875,82.525 49.875,83.975 R25_MOSFET_BANK_1.1@49.9,84
  other v1: 49.25,82.5
PD_4_MOSFET_BANK_2: R21_MOSFET_BANK_2.1 R25_MOSFET_BANK_2.1 U6_MOSFET_BANK_2.11 | length 12.8
  TOP SIG w0.3: v1(69.25,71) 69.25,70.35 69.703,69.897 69.703,65.547 71.525,63.725 U6_MOSFET_BANK_2.11@71.525,60.7 ; R21_MOSFET_BANK_2.1@75.85,82.5 75.875,82.525 75.875,83.975 R25_MOSFET_BANK_2.1@75.9,84
  other v1: 75.25,82.5
PD_4_MOSFET_BANK_3: R21_MOSFET_BANK_3.1 R25_MOSFET_BANK_3.1 U6_MOSFET_BANK_3.11 | length 12.8
  TOP SIG w0.3: v1(95.25,71) 95.25,70.35 95.703,69.897 95.703,65.547 97.525,63.725 U6_MOSFET_BANK_3.11@97.525,60.7 ; R21_MOSFET_BANK_3.1@101.85,82.5 101.875,82.525 101.875,83.975 R25_MOSFET_BANK_3.1@101.9,84
  other v1: 101.25,82.5
PRE_CAN_N: L1.3 U8.12
PRE_CAN_P: L1.2 U8.13
PRE_SHUNT: Q2.5-6-7-8 Q4.5-6-7-8 U7.3 U7.4
PRE_VCC: D1.1 D2.2 Q1.1 Q1.2 Q1.3 Q2.1 Q2.2 Q2.3 Q3.1 Q3.2 Q3.3 Q4.1 Q4.2 Q4.3 R28.2
PWR_IN: J1.7 J1.8 J1.18 J1.19 J1.29 J1.30 XF1.1 XF1.2
PWR_MOSFET: Q2.4 Q4.4 Q5.3 R28.1
PWR_OUT: F1.1 U7.1 U7.2 XF2.1 XF2.2 XF3.1 XF3.2 XF4.1 XF4.2 XF5.1 XF5.2 XF6.1 XF6.2 | length 3
  TOP SIG w1: F1.1@26.368,37.646 29.37,37.646
R_LED: R44.1 U10.16
REG_EN_12V_REG_0: R51_12V_REG_0.1 U11_12V_REG_0.7
  other v1: 112.15,4.19
REG_EN_12V_REG_1: R51_12V_REG_1.1 U11_12V_REG_1.7
  other v1: 151.65,54.19
REG_EN_12V_REG_2: R51_12V_REG_2.1 U11_12V_REG_2.7
  other v1: 119.65,54.19
REG_PWR_IN_12V_REG_0: C40_12V_REG_0.2 C41_12V_REG_0.2 C42_12V_REG_0.2 U11_12V_REG_0.2 XF3.3 XF3.4
REG_PWR_IN_12V_REG_1: C40_12V_REG_1.2 C41_12V_REG_1.2 C42_12V_REG_1.2 U11_12V_REG_1.2 XF4.3 XF4.4
REG_PWR_IN_12V_REG_2: C40_12V_REG_2.2 C41_12V_REG_2.2 C42_12V_REG_2.2 U11_12V_REG_2.2 XF5.3 XF5.4
RESETN: C23.1 J4.10 R40.1 R42.2 U10.14
RP_MOS_LINK: D1.2 Q1.4 Q3.4 R27.2
STAT_12_MOSFET_BANK_0: R5_MOSFET_BANK_0.2 R7_MOSFET_BANK_0.1 U2_MOSFET_BANK_0.8 | length 4.3
  TOP SIG w0.3: R7_MOSFET_BANK_0.1@10.5,58.15 11.925,58.15 11.675,58.4 U2_MOSFET_BANK_0.8@11.675,60.95
STAT_12_MOSFET_BANK_1: R5_MOSFET_BANK_1.2 R7_MOSFET_BANK_1.1 U2_MOSFET_BANK_1.8 | length 4.3
  TOP SIG w0.3: R7_MOSFET_BANK_1.1@36.5,58.15 37.925,58.15 37.675,58.4 U2_MOSFET_BANK_1.8@37.675,60.95
STAT_12_MOSFET_BANK_2: R5_MOSFET_BANK_2.2 R7_MOSFET_BANK_2.1 U2_MOSFET_BANK_2.8 | length 4.3
  TOP SIG w0.3: R7_MOSFET_BANK_2.1@62.5,58.15 63.925,58.15 63.675,58.4 U2_MOSFET_BANK_2.8@63.675,60.95
STAT_12_MOSFET_BANK_3: R5_MOSFET_BANK_3.2 R7_MOSFET_BANK_3.1 U2_MOSFET_BANK_3.8 | length 4.3
  TOP SIG w0.3: R7_MOSFET_BANK_3.1@88.5,58.15 89.925,58.15 89.675,58.4 U2_MOSFET_BANK_3.8@89.675,60.95
STAT_34_MOSFET_BANK_0: R6_MOSFET_BANK_0.2 R8_MOSFET_BANK_0.1 U2_MOSFET_BANK_0.4 | length 4.5
  TOP SIG w0.3: R8_MOSFET_BANK_0.1@4.5,58.15 R6_MOSFET_BANK_0.2@6,58.15 6,59 6.595,59.595 U2_MOSFET_BANK_0.4@6.595,60.95
STAT_34_MOSFET_BANK_1: R6_MOSFET_BANK_1.2 R8_MOSFET_BANK_1.1 U2_MOSFET_BANK_1.4 | length 4.5
  TOP SIG w0.3: R8_MOSFET_BANK_1.1@30.5,58.15 R6_MOSFET_BANK_1.2@32,58.15 32,59 32.595,59.595 U2_MOSFET_BANK_1.4@32.595,60.95
STAT_34_MOSFET_BANK_2: R6_MOSFET_BANK_2.2 R8_MOSFET_BANK_2.1 U2_MOSFET_BANK_2.4 | length 4.5
  TOP SIG w0.3: R8_MOSFET_BANK_2.1@56.5,58.15 R6_MOSFET_BANK_2.2@58,58.15 58,59 58.595,59.595 U2_MOSFET_BANK_2.4@58.595,60.95
STAT_34_MOSFET_BANK_3: R6_MOSFET_BANK_3.2 R8_MOSFET_BANK_3.1 U2_MOSFET_BANK_3.4 | length 4.5
  TOP SIG w0.3: R8_MOSFET_BANK_3.1@82.5,58.15 R6_MOSFET_BANK_3.2@84,58.15 84,59 84.595,59.595 U2_MOSFET_BANK_3.4@84.595,60.95
SWCLK: J4.4 R38.1 U10.76
SWDIO: J4.2 U10.72
SWO: J4.6 U10.89
TCAN1146_5V: C9.1 C15.2 U8.3 U9.1
TEMP_SENSE_MOSFET_BANK_0: R11_MOSFET_BANK_0.1 R12_MOSFET_BANK_0.1 | length 5.2
  TOP SIG w0.3: R12_MOSFET_BANK_0.1@15,56.85 14.925,56.85 14.273,57.502 14.273,58.973 15.6,60.3 R11_MOSFET_BANK_0.1@16.5,60.3
TEMP_SENSE_MOSFET_BANK_1: R11_MOSFET_BANK_1.1 R12_MOSFET_BANK_1.1 | length 5.2
  TOP SIG w0.3: R12_MOSFET_BANK_1.1@41,56.85 40.925,56.85 40.273,57.502 40.273,58.973 41.6,60.3 R11_MOSFET_BANK_1.1@42.5,60.3
TEMP_SENSE_MOSFET_BANK_2: R11_MOSFET_BANK_2.1 R12_MOSFET_BANK_2.1 | length 5.2
  TOP SIG w0.3: R12_MOSFET_BANK_2.1@67,56.85 66.925,56.85 66.273,57.502 66.273,58.973 67.6,60.3 R11_MOSFET_BANK_2.1@68.5,60.3
TEMP_SENSE_MOSFET_BANK_3: R11_MOSFET_BANK_3.1 R12_MOSFET_BANK_3.1 | length 5.2
  TOP SIG w0.3: R12_MOSFET_BANK_3.1@93,56.85 92.925,56.85 92.273,57.502 92.273,58.973 93.6,60.3 R11_MOSFET_BANK_3.1@94.5,60.3
TERM_CAP: C17.2 R35.1 R37.2
VCC: R29.2
VCC_I_SENSE: U7.7
VCC_SENSE: R29.1 R31.2
VDDA: C30.1 C31.1 C38.1 C39.1 FB1.2 U10.20 U10.21 | length 13.3
  TOP SIG w0.3: U10.21@86.925,-111 88,-111 89.086,-109.914 v1(89.086,-109.271) ; U10.20@86.925,-110.5 87.824,-110.5 88.5,-109.824 88.5,-108.612 88.75,-108.362 v1(88.75,-108.336)
  BOT SIG w0.3: C31.1@88.75,-109.271 v1(89.086,-109.271) C30.1@90.25,-109.271 90.25,-109.25 90.436,-109.064 90.665,-109.064 91.542,-108.186 91.564,-108.186 91.75,-108 FB1.2@91.75,-107.979 C38.1@90.25,-107.979 C39.1@88.75,-107.979
X32_N: C21.1 U10.9 Y2.2
X32_P: C20.1 U10.8 Y2.1
X_N: C18.1 U10.13 Y1.1
X_P: C19.1 U10.12 Y1.3
pads on no net: J1. J2. J2.1 J2.2 J2.3 J2.4 J2.5 J2.6 J2.7 J2.8 J2.9 J2.10 J2.11 J2.12 J2.13 J2.14 J2.15 J2.16 J2.17 J2.18 J2.19 J2.20 J2.21 J2.22 J2.23 J2.24 J2.25 J2.26 J2.27 J2.28 J2.29 J2.30 J2.31 J2.32 J2.33 J2.34 J2.35 J4.7 J4.8 J4.9
copper on no net: | length 26.7
  TOP SIG w0.3: 100.5,27.85 100.5,27 100,26.5 100,25.6 100.55,25.05 100.7,25.05 ; 100.7,25.95 100.85,25.95 101.9,27 101.9,27.75 102,27.85 ; 102.3,25.05 103.05,25.05 103.75,25.75 105,25.75 ; 108,77.85 108,77 107.5,76.5 107.5,75.6 108.05,75.05 108.2,75.05 ; 108.2,75.95 108.35,75.95 109.4,77 109.4,77.75 109.5,77.85 ; 109.8,75.05 110.55,75.05 111.25,75.75 112.5,75.75 ; 140,77.85 140,77 139.5,76.5 139.5,75.6 140.05,75.05 140.2,75.05 ; 140.2,75.95 140.35,75.95 141.4,77 141.4,77.75 141.5,77.85 ; 141.8,75.05 142.55,75.05 143.25,75.75 144.5,75.75

## Polygon pours and split planes (outlines as drawn)
AMP_36V on TOP SIG "AMP_36V_L01_P115" (solid, remove dead copper, pour order 115): 158,11 158,8 152,8 152,2.5 162,2.5 162,11
NetQ1_5-6-7-8 on TOP SIG "NETQ1_5-6-7-8_L01_P114" (solid, remove dead copper, pour order 114): 56.5,48.5 56.5,53 76.5,53 76.5,45 65,45 65,48.5
PRE_SHUNT on TOP SIG "PRE_SHUNT_L01_P113" (solid, remove dead copper, pour order 113): 56.5,42.5 56.5,46 65,46 65,39 60.5,39 60.5,42.5
no net on TOP SIG "NONET_L01_P112" (solid, pour order 112): 57.35,48.34 57.35,47.84 58,46.66 58,46.16 63.65,46.16 63.65,46.66 63,47.84 63,48.34
NetL3_1 on TOP SIG "NETL3_1_L01_P093" (solid, pour order 93): 137.5,52 137.5,28 129.5,28 129.5,52
AMP_VCC on TOP SIG "AMP_VCC_L01_P107" (solid, pour order 107): 129.5,52 129.5,42 129,42 129,39.5 122,39.5 122,52
12V_FB_12V_REG_0 on TOP SIG "12V_FB_12V_REG_0_L01_P083" (solid, pour order 83): 123,28 119.5,28 119.5,25.5 104.5,25.5 104.5,31 101.5,31 101.5,36 118.5,36 118.5,38 123,38
NetC47_12V_REG_0_2 on TOP SIG "NETC47_12V_REG_0_2_L01_P086" (solid, pour order 86): 119.5,28 127.5,28 127.5,18.5 119.5,18.5 119.5,14 117,14 117,11.25 110,11.25 110,25.5 119.5,25.5
REG_PWR_IN_12V_REG_0 on TOP SIG "REG_PWR_IN_12V_REG_0_L01_P104" (solid, pour order 104): 98.5,15.5 110,15.5 110,11.25 117,11.25 117,9.75 110,9.75 110,9 98.5,9
PWR_OUT on TOP SIG "PWR_OUT_L01_P099" (solid, pour order 99): 60.5,39 65,39 65,45 76.5,45 76.5,5 60.5,5
REG_PWR_IN_12V_REG_2 on TOP SIG "REG_PWR_IN_12V_REG_2_L01_P108" (solid, pour order 108): 76.5,37 97,37 97,29 76.5,29
REG_PWR_IN_12V_REG_1 on TOP SIG "REG_PWR_IN_12V_REG_1_L01_P109" (solid, pour order 109): 76.5,29 86.75,29 86.75,21 76.5,21
REG_PWR_IN_12V_REG_0 on TOP SIG "REG_PWR_IN_12V_REG_0_L01_P110" (solid, pour order 110): 76.5,21 86.75,21 86.75,13 76.5,13
AMP_VCC on TOP SIG "AMP_VCC_L01_P111" (solid, pour order 111): 76.5,13 86.75,13 86.75,5 76.5,5
NetC66_1 on TOP SIG "NETC66_1_L01_P094" (solid, pour order 94): 137.5,37 137.5,28 142,28 142,22.5 149,22.5 149,37
BST_REG_OUT on TOP SIG "BST_REG_OUT_L01_P095" (solid, pour order 95): 137.5,37 137.5,44.5 164,44.5 164,34 162,34 162,11 133,11 133,20.5 140.5,20.5 140.5,19.5 153.5,19.5 153.5,32 149,32 149,37
REG_PWR_IN_12V_REG_1 on TOP SIG "REG_PWR_IN_12V_REG_1_L01_P106" (solid, pour order 106): 138,65.5 149.5,65.5 149.5,61.25 156.5,61.25 156.5,59.75 149.5,59.75 149.5,59 138,59
REG_PWR_IN_12V_REG_2 on TOP SIG "REG_PWR_IN_12V_REG_2_L01_P105" (solid, pour order 105): 106,65.5 117.5,65.5 117.5,61.25 124.5,61.25 124.5,59.75 117.5,59.75 117.5,59 106,59
12V_FB_12V_REG_1 on TOP SIG "12V_FB_12V_REG_1_L01_P085" (solid, pour order 85): 162.5,78 159,78 159,75.5 144,75.5 144,81 141,81 141,86 158,86 158,88 162.5,88
NetC47_12V_REG_1_2 on TOP SIG "NETC47_12V_REG_1_2_L01_P088" (solid, pour order 88): 159,78 167,78 167,68.5 159,68.5 159,64 156.5,64 156.5,61.25 149.5,61.25 149.5,75.5 159,75.5
12V_FB_12V_REG_2 on TOP SIG "12V_FB_12V_REG_2_L01_P084" (solid, pour order 84): 130.5,78 127,78 127,75.5 112,75.5 112,81 109,81 109,86 126,86 126,88 130.5,88
NetC47_12V_REG_2_2 on TOP SIG "NETC47_12V_REG_2_2_L01_P087" (solid, pour order 87): 127,78 135,78 135,68.5 127,68.5 127,64 124.5,64 124.5,61.25 117.5,61.25 117.5,75.5 127,75.5
M2_OUT_MOSFET_BANK_3 on TOP SIG "M2_OUT_MOSFET_BANK_3_L01_P058" (solid, pour order 58): 88.5,77 88.5,74 91.5,74 91.5,77
M4_OUT_MOSFET_BANK_3 on TOP SIG "M4_OUT_MOSFET_BANK_3_L01_P082" (solid, pour order 82): 100.5,77 100.5,74 103.5,74 103.5,77
M4_PRE_SHUNT_MOSFET_BANK_3 on TOP SIG "M4_PRE_SHUNT_MOSFET_BANK_3_L01_P078" (solid, pour order 78): 97.5,77 100.5,77 100.5,74 97.5,74
M3_OUT_MOSFET_BANK_3 on TOP SIG "M3_OUT_MOSFET_BANK_3_L01_P074" (solid, pour order 74): 94.5,77 94.5,74 97.5,74 97.5,77
M3_PRE_SHUNT_MOSFET_BANK_3 on TOP SIG "M3_PRE_SHUNT_MOSFET_BANK_3_L01_P070" (solid, pour order 70): 91.5,77 94.5,77 94.5,74 91.5,74
M1_OUT_MOSFET_BANK_3 on TOP SIG "M1_OUT_MOSFET_BANK_3_L01_P066" (solid, pour order 66): 82.5,77 82.5,74 85.5,74 85.5,77
M1_PRE_SHUNT_MOSFET_BANK_3 on TOP SIG "M1_PRE_SHUNT_MOSFET_BANK_3_L01_P062" (solid, pour order 62): 79.5,77 82.5,77 82.5,74 79.5,74
M2_PRE_SHUNT_MOSFET_BANK_3 on TOP SIG "M2_PRE_SHUNT_MOSFET_BANK_3_L01_P054" (solid, pour order 54): 85.5,77 88.5,77 88.5,74 85.5,74
M2_OUT_MOSFET_BANK_2 on TOP SIG "M2_OUT_MOSFET_BANK_2_L01_P057" (solid, pour order 57): 62.5,77 62.5,74 65.5,74 65.5,77
M4_OUT_MOSFET_BANK_2 on TOP SIG "M4_OUT_MOSFET_BANK_2_L01_P081" (solid, pour order 81): 74.5,77 74.5,74 77.5,74 77.5,77
M4_PRE_SHUNT_MOSFET_BANK_2 on TOP SIG "M4_PRE_SHUNT_MOSFET_BANK_2_L01_P077" (solid, pour order 77): 71.5,77 74.5,77 74.5,74 71.5,74
M3_OUT_MOSFET_BANK_2 on TOP SIG "M3_OUT_MOSFET_BANK_2_L01_P073" (solid, pour order 73): 68.5,77 68.5,74 71.5,74 71.5,77
M3_PRE_SHUNT_MOSFET_BANK_2 on TOP SIG "M3_PRE_SHUNT_MOSFET_BANK_2_L01_P069" (solid, pour order 69): 65.5,77 68.5,77 68.5,74 65.5,74
M1_OUT_MOSFET_BANK_2 on TOP SIG "M1_OUT_MOSFET_BANK_2_L01_P065" (solid, pour order 65): 56.5,77 56.5,74 59.5,74 59.5,77
M1_PRE_SHUNT_MOSFET_BANK_2 on TOP SIG "M1_PRE_SHUNT_MOSFET_BANK_2_L01_P061" (solid, pour order 61): 53.5,77 56.5,77 56.5,74 53.5,74
M2_PRE_SHUNT_MOSFET_BANK_2 on TOP SIG "M2_PRE_SHUNT_MOSFET_BANK_2_L01_P053" (solid, pour order 53): 59.5,77 62.5,77 62.5,74 59.5,74
M2_OUT_MOSFET_BANK_1 on TOP SIG "M2_OUT_MOSFET_BANK_1_L01_P056" (solid, pour order 56): 36.5,77 36.5,74 39.5,74 39.5,77
M4_OUT_MOSFET_BANK_1 on TOP SIG "M4_OUT_MOSFET_BANK_1_L01_P080" (solid, pour order 80): 48.5,77 48.5,74 51.5,74 51.5,77
M4_PRE_SHUNT_MOSFET_BANK_1 on TOP SIG "M4_PRE_SHUNT_MOSFET_BANK_1_L01_P076" (solid, pour order 76): 45.5,77 48.5,77 48.5,74 45.5,74
M3_OUT_MOSFET_BANK_1 on TOP SIG "M3_OUT_MOSFET_BANK_1_L01_P072" (solid, pour order 72): 42.5,77 42.5,74 45.5,74 45.5,77
M3_PRE_SHUNT_MOSFET_BANK_1 on TOP SIG "M3_PRE_SHUNT_MOSFET_BANK_1_L01_P068" (solid, pour order 68): 39.5,77 42.5,77 42.5,74 39.5,74
M1_OUT_MOSFET_BANK_1 on TOP SIG "M1_OUT_MOSFET_BANK_1_L01_P064" (solid, pour order 64): 30.5,77 30.5,74 33.5,74 33.5,77
M1_PRE_SHUNT_MOSFET_BANK_1 on TOP SIG "M1_PRE_SHUNT_MOSFET_BANK_1_L01_P060" (solid, pour order 60): 27.5,77 30.5,77 30.5,74 27.5,74
M2_PRE_SHUNT_MOSFET_BANK_1 on TOP SIG "M2_PRE_SHUNT_MOSFET_BANK_1_L01_P052" (solid, pour order 52): 33.5,77 36.5,77 36.5,74 33.5,74
M2_PRE_SHUNT_MOSFET_BANK_0 on TOP SIG "M2_PRE_SHUNT_MOSFET_BANK_0_L01_P051" (solid, pour order 51): 7.5,77 10.5,77 10.5,74 7.5,74
M1_PRE_SHUNT_MOSFET_BANK_0 on TOP SIG "M1_PRE_SHUNT_MOSFET_BANK_0_L01_P059" (solid, pour order 59): 1.5,77 4.5,77 4.5,74 1.5,74
M1_OUT_MOSFET_BANK_0 on TOP SIG "M1_OUT_MOSFET_BANK_0_L01_P063" (solid, pour order 63): 4.5,77 4.5,74 7.5,74 7.5,77
M3_PRE_SHUNT_MOSFET_BANK_0 on TOP SIG "M3_PRE_SHUNT_MOSFET_BANK_0_L01_P067" (solid, pour order 67): 13.5,77 16.5,77 16.5,74 13.5,74
M3_OUT_MOSFET_BANK_0 on TOP SIG "M3_OUT_MOSFET_BANK_0_L01_P071" (solid, pour order 71): 16.5,77 16.5,74 19.5,74 19.5,77
M4_PRE_SHUNT_MOSFET_BANK_0 on TOP SIG "M4_PRE_SHUNT_MOSFET_BANK_0_L01_P075" (solid, pour order 75): 19.5,77 22.5,77 22.5,74 19.5,74
M4_OUT_MOSFET_BANK_0 on TOP SIG "M4_OUT_MOSFET_BANK_0_L01_P079" (solid, pour order 79): 22.5,77 22.5,74 25.5,74 25.5,77
M2_OUT_MOSFET_BANK_0 on TOP SIG "M2_OUT_MOSFET_BANK_0_L01_P055" (solid, pour order 55): 10.5,77 10.5,74 13.5,74 13.5,77
AMP_VCC on GND "AMP_VCC_L02_P092" (solid, pour order 92): 129.5,52 129.5,42 129,42 129,39.5 122,39.5 122,52
REG_PWR_IN_12V_REG_0 on GND "REG_PWR_IN_12V_REG_0_L02_P089" (solid, pour order 89): 98.5,15.5 110,15.5 110,11.25 117,11.25 117,9.75 110,9.75 110,9 98.5,9
REG_PWR_IN_12V_REG_2 on GND "REG_PWR_IN_12V_REG_2_L02_P100" (solid, pour order 100): 76.5,37 86.75,37 86.75,29 76.5,29
REG_PWR_IN_12V_REG_1 on GND "REG_PWR_IN_12V_REG_1_L02_P101" (solid, pour order 101): 76.5,29 86.75,29 86.75,21 76.5,21
REG_PWR_IN_12V_REG_0 on GND "REG_PWR_IN_12V_REG_0_L02_P102" (solid, pour order 102): 76.5,21 86.75,21 86.75,13 76.5,13
AMP_VCC on GND "AMP_VCC_L02_P103" (solid, pour order 103): 76.5,13 86.75,13 86.75,5 76.5,5
REG_PWR_IN_12V_REG_2 on GND "REG_PWR_IN_12V_REG_2_L02_P090" (solid, pour order 90): 106,65.5 117.5,65.5 117.5,61.25 124.5,61.25 124.5,59.75 117.5,59.75 117.5,59 106,59
REG_PWR_IN_12V_REG_1 on GND "REG_PWR_IN_12V_REG_1_L02_P091" (solid, pour order 91): 138,65.5 149.5,65.5 149.5,61.25 156.5,61.25 156.5,59.75 149.5,59.75 149.5,59 138,59

## Silkscreen, mask and mechanical layers (free items; w line width, h text height)
Top Overlay:
  drawing of 12 lines, arcs and shapes, not listed
  text "STAT" at 111.793,73.619 h1.52 r180
  text "STAT" at 143.793,73.619 h1.52 r180
  text "MAIN" at 88.5,48 h2
  text "BCM" at 88.5,40 h2
  text "12VA" at 88.5,32 h2
  text "12VB" at 88.5,24 h2
  text "12VC" at 88.5,16 h2
  text "BCM ECU" at 9.5,15.5 h5
  text "Project:" at 9.5,11.166 h2
  text "BRZ" at 27.35,10.85 h2
  text "AMP" at 88.5,8 h2
  text "Revision:" at 9.5,7.5 h2
  text "revA" at 27.35,7.35 h2
  text "Date:" at 9.5,3.5 h2
  text "15/03/2025" at 27.35,3.35 h2
Mechanical 1:
  the board outline again, w0.15